# Altium PCB Mainbord___PCB.PcbDoc
Units mm, origin at the board's own origin, x right, y up, seen from the top; angles counter-clockwise.
Board outline 180 x 125 mm, 2 copper layers (Top Layer, Bottom Layer); 20 components, 15 nets, 201 pads, 0 vias.
Unrouted connection lines stored in the file: 57.
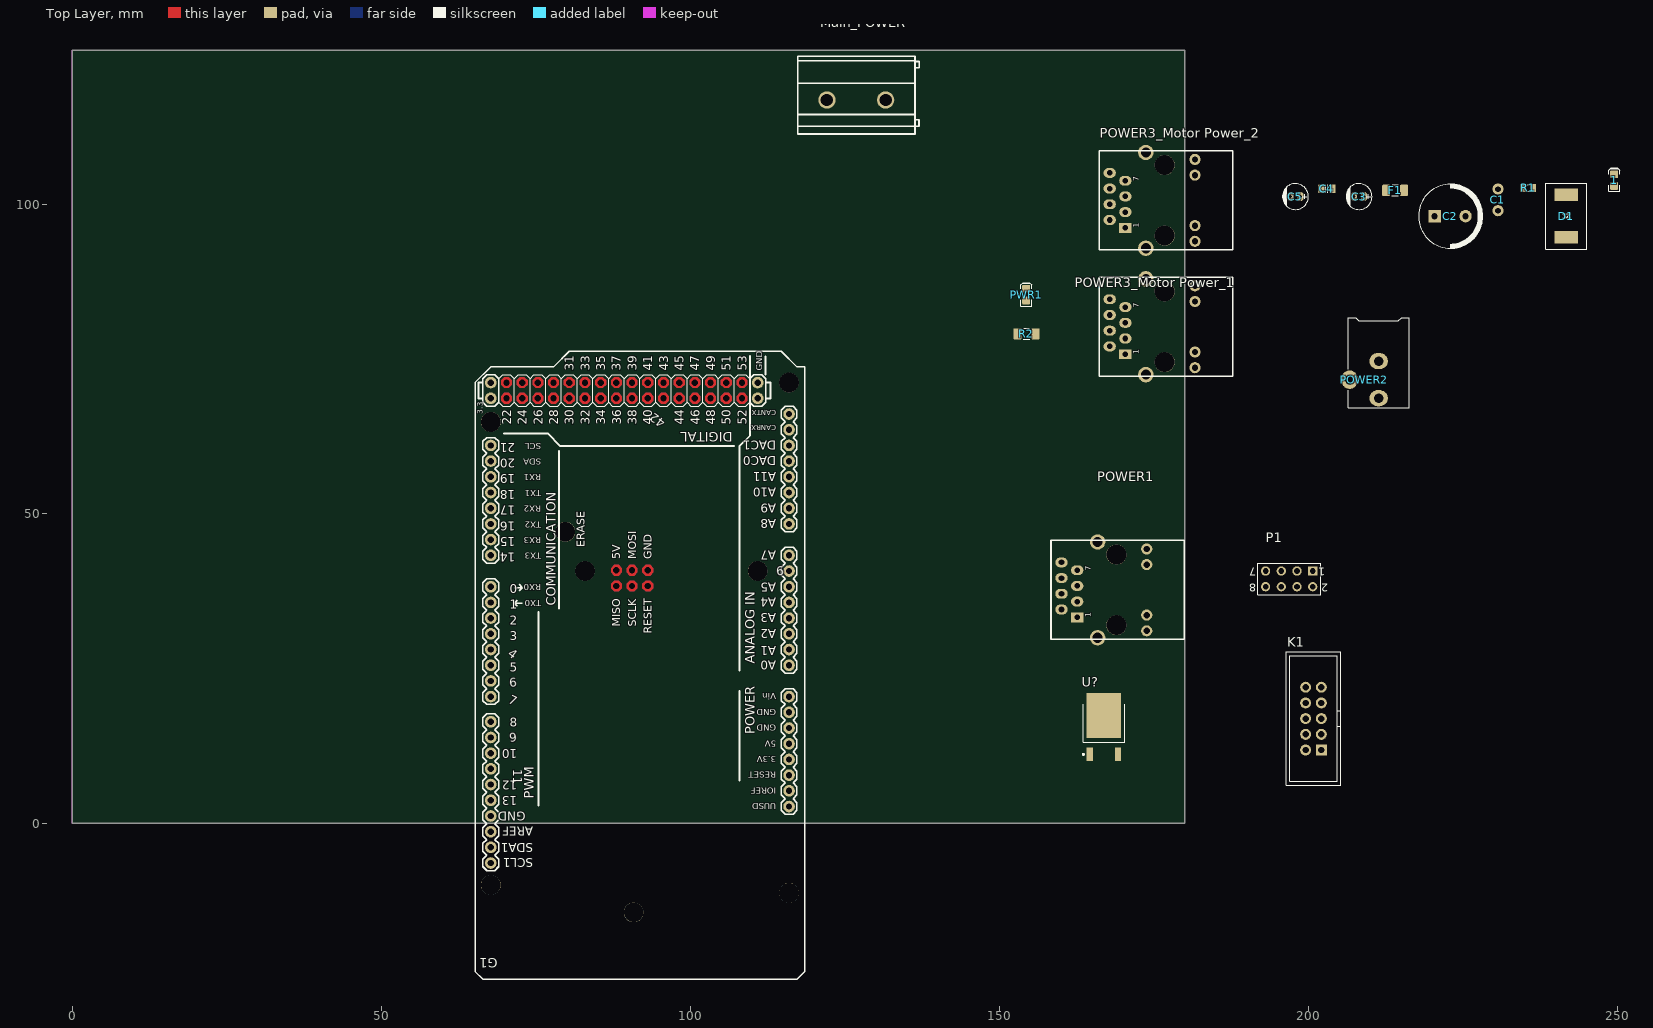
[diagram p0: Top Layer view]
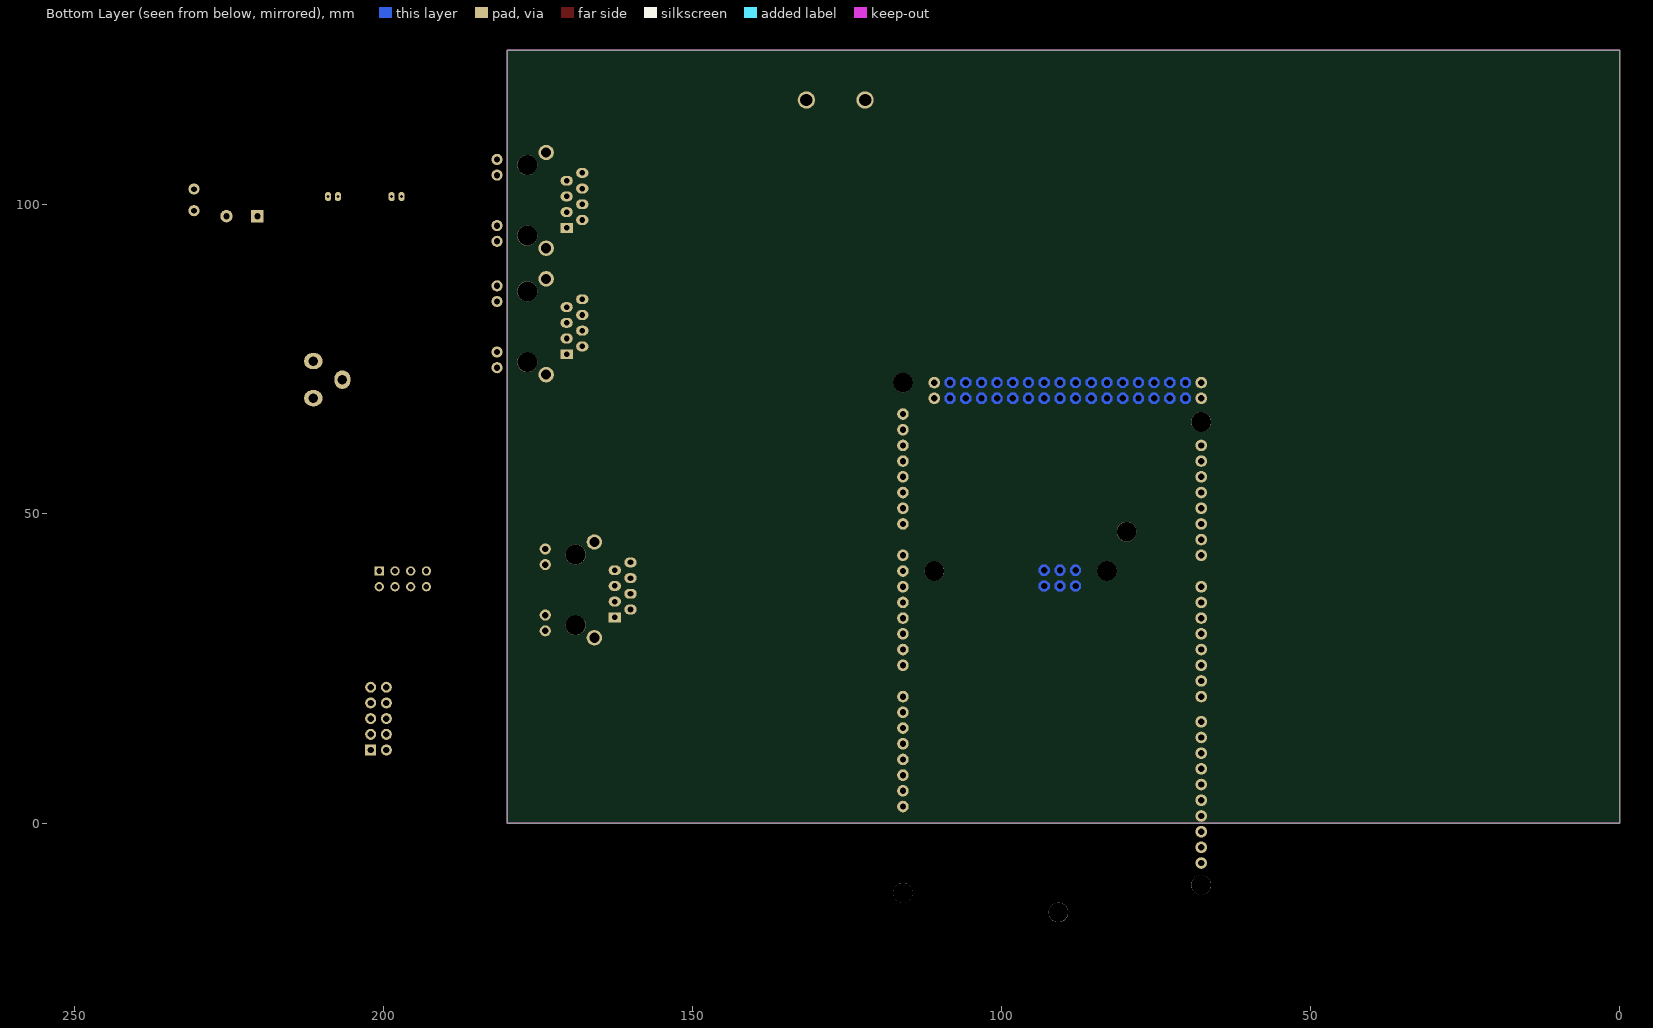
[diagram p1: Bottom Layer view, seen from below]

## Layer stack, top to bottom
Top Solder: solder mask 0.0102, Solder Resist, Dk 3.5
Top Layer: signal copper 0.0356
Dielectric 1: dielectric 0.32, FR-4, Dk 4.8
Bottom Layer: signal copper 0.0356
Bottom Solder: solder mask 0.0102, Solder Resist, Dk 3.5

## Board outline
0,0 180,0 180,125 0,125

## Design rules (kind name [scope] priority, off if disabled: settings)
Clearance [All] p1: gap=0.254 ignorepadtopadclearanceinfootprint=FALSE except(0: Arc-Hole Track-Hole SMDPad-Hole THPad-Hole Via-Hole Fill-Hole Poly-Hole Region-Hole Text-Hole)
PolygonConnect [All] p1: connectstyle=Relief reliefconductorwidth=0.254 reliefentries=4 polygonreliefangle="90 Angle" airgapwidth=0.254
RoomDefinition VL53L0x [InComponentClass('VL53L0x')] p1: confinementstyle=ConfineIn formatcopy=TRUE lockcomponents=FALSE outline 195.961,4.826 205.359,4.826 205.359,29.464 195.961,29.464
RoomDefinition "Motor Power_2" [InComponentClass('Motor Power_2')] p2: confinementstyle=ConfineIn formatcopy=TRUE lockcomponents=FALSE outline -25.4,-25.4 25.4,-25.4 25.4,0 -25.4,0
RoomDefinition "Motor Power_1" [InComponentClass('Motor Power_1')] p3: confinementstyle=ConfineIn formatcopy=TRUE lockcomponents=FALSE outline -25.4,-25.4 25.4,-25.4 25.4,0 -25.4,0
RoomDefinition Mainbord___Schematic [InComponentClass('Mainbord___Schematic')] p4: confinementstyle=ConfineIn formatcopy=TRUE lockcomponents=FALSE outline -25.4,-25.4 25.4,-25.4 25.4,0 -25.4,0
RoomDefinition SRF05_Sensor [InComponentClass('SRF05_Sensor')] p5: confinementstyle=ConfineIn formatcopy=TRUE lockcomponents=FALSE outline 189.992,42.418 189.992,36.83 205.867,36.83 205.867,42.418
RoutingVias [All] p1: holewidth=0.711 width=1.27 viastyle="Through Hole" minholewidth=0.711 minwidth=1.27 maxholewidth=0.711 maxwidth=1.27
SolderMaskExpansion [All] p1: expansion=0.102 istentingtop=FALSE
Width [All] p1: maxlimit=0.254 minlimit=0.254 preferedwidth=0.254
30 further rules are at their usual default settings.

## Classes and differential pairs
component class VL53L0x: K1
channel class Power_Block: "Motor Power_1" "Motor Power_2"
component class SRF05_Sensor: P1
component class "Motor Power_1": "POWER3_Motor Power_1"
component class "Motor Power_2": "POWER3_Motor Power_2"
component class Mainbord___Schematic: 1 C1 C2 C3 C4 C5 D1 F1 G1 Main_POWER POWER1 POWER2 PWR1 R1 R2 U?

## Components (designator, comment, footprint, x,y, rotation, side; value= is the part's Value field where it differs from the comment)
1 "Red" LED-0805-K 249.428,104.013 r90 top
C1 "330pF" "CAP Ceramic 3.5mm" 230.632,99.06 r90 top
C2 "1000u" "Cap electrolitic radial 10x16-5" 222.885,98.171 r0 top
C3 "0.1uF" "cap 00" 208.153,101.346 r0 top
C4 "approved sub OK" CAPC2012X135N 202.946,102.616 r0 top value=0.1µ
C5 "0.3uF" "cap 00" 197.866,101.346 r0 top
D1 "SMCJ120CA" DIODE-SMC 241.681,102.108 r90 top
F1 "Slow-blow" RESC3216X70N 213.995,102.362 r0 top value=2A
G1 "" Arduino_Due 67.691,71.247 r90 top
K1 "IDC10" IDC10-B 202.057,11.811 r90 top
Main_POWER "Stackable ScrewTerm" CONN-TH_P9.50_KF950-9.5-2P 127.172,117.767 r180 top value="2 position"
P1 "Header 4X2" HDR2X4 200.66,40.767 r180 top
POWER1 "215877-1 RJ45" Rj45_DS1127__HR911105A 162.56,33.274 r0 top
POWER2 "CONN_PWR_JACK_2.1x5.5mm" CONN_PWR_JACK_2.1x5.5mm 211.328,82.423 r0 top value="2.1mm ID, 5.5mm OD"
"POWER3_Motor Power_1" "215877-1 RJ45" Rj45_DS1127__HR911105A 170.36,75.84 r0 top (schematic designator POWER3)
"POWER3_Motor Power_2" "215877-1 RJ45" Rj45_DS1127__HR911105A 170.36,96.287 r0 top (schematic designator POWER3)
PWR1 "Red" LED-0805-K 154.305,85.471 r90 top
R1 "330" "RES 0805 (2012X06L)" 234.696,102.743 r0 top
R2 "Thin Film" RESC3216X70N 154.358,79.121 r0 top value=4.7K
U? "L7805" TO252-3M 166.878,15.494 r90 top

## Footprints (in the part's own frame and the unit in brackets; to place one, negate y for a bottom-side part, rotate by r counter-clockwise, add the part's x,y. Pads: shape width x height; smd on the part's side, far side on the other; paste and mask are expansions set on the pad)
Arduino_Due [mil] "Arduino_Due"
  round 74 hole 40: 0(-1300,0) 1(-1400,0) 2(-1500,0) 3(-1600,0) 3.3V(-2400,-1900) 4(-1700,0) 5(-1800,0) 5V@0(-2300,-1900) 5V@1(-100,0) 5V@2(0,0) 6(-1900,0) 7(-2000,0) 8(-2160,0) 9(-2260,0) 10(-2360,0) 11(-2460,0) 12(-2560,0) 13(-2660,0) 14(-1100,0) 15(-1000,0) 16(-900,0) 17(-800,0) 18(-700,0) 19(-600,0) 20(-500,0) 21(-400,0) A0(-1800,-1900) A1(-1700,-1900) A2(-1600,-1900) A3(-1500,-1900) A4(-1400,-1900) A5(-1300,-1900) A6(-1200,-1900) A7(-1100,-1900) A8(-900,-1900) A9(-800,-1900) A10(-700,-1900) A11(-600,-1900) AREF(-2860,0) CANRX(-300,-1900) CANTX(-200,-1900) DAC0(-500,-1900) DAC1(-400,-1900) GND@0(-2200,-1900) GND@1(-2100,-1900) GND@2(-100,-1700) GND@3(0,-1700) GND@4(-2760,0) IOREF(-2600,-1900) RESET(-2500,-1900) SCL1(-3060,0) SDA1(-2960,0) UUSD(-2700,-1900) VIN(-2000,-1900)
  round 0 hole 40: 5V@ICSP(-1195,-800) 22(-100,-100) 23(0,-100) 24(-100,-200) 25(0,-200) 26(-100,-300) 27(0,-300) 28(-100,-400) 29(0,-400) 30(-100,-500) 31(0,-500) 32(-100,-600) 33(0,-600) 34(-100,-700) 35(0,-700) 36(-100,-800) 37(0,-800) 38(-100,-900) 39(0,-900) 40(-100,-1000) 41(0,-1000) 42(-100,-1100) 43(0,-1100) 44(-100,-1200) 45(0,-1200) 46(-100,-1300) 47(0,-1300) 48(-100,-1400) 49(0,-1400) 50(-100,-1500) 51(0,-1500) 52(-100,-1600) 53(0,-1600) GND@ICSP(-1195,-1000) MISO(-1295,-800) MOSI(-1195,-900) RESET@ICSP(-1295,-1000) SCLK(-1295,-900)
  round 125.98 hole 125.98 unplated: ""(-3374,-910) ""(-3250,-1900) ""(-3200,0) ""(-1200,-1700) ""(-1200,-600) ""(-950,-475) ""(-250,0) ""(0,-1900)
  Top Layer region: -14.16,-765.82 -34.19,-785.84 -34.19,-814.16 -14.16,-834.19 14.15,-834.19 34.18,-814.16 34.18,-785.84 14.15,-765.82
  Top Layer region: -114.16,-765.82 -134.19,-785.84 -134.19,-814.16 -114.16,-834.19 -85.85,-834.19 -65.82,-814.16 -65.82,-785.84 -85.85,-765.82
  Top Layer region: -14.16,-665.82 -34.19,-685.84 -34.19,-714.16 -14.16,-734.19 14.15,-734.19 34.18,-714.16 34.18,-685.84 14.15,-665.82
  Top Layer region: -114.16,-665.82 -134.19,-685.84 -134.19,-714.16 -114.16,-734.19 -85.85,-734.19 -65.82,-714.16 -65.82,-685.84 -85.85,-665.82
  Top Layer region: -14.16,-565.82 -34.19,-585.84 -34.19,-614.16 -14.16,-634.19 14.15,-634.19 34.18,-614.16 34.18,-585.84 14.15,-565.82
  Top Layer region: -114.16,-565.82 -134.19,-585.84 -134.19,-614.16 -114.16,-634.19 -85.85,-634.19 -65.82,-614.16 -65.82,-585.84 -85.85,-565.82
  Top Layer region: -14.16,-465.82 -34.19,-485.84 -34.19,-514.16 -14.16,-534.19 14.15,-534.19 34.18,-514.16 34.18,-485.84 14.15,-465.82
  Top Layer region: -114.16,-465.82 -134.19,-485.84 -134.19,-514.16 -114.16,-534.19 -85.85,-534.19 -65.82,-514.16 -65.82,-485.84 -85.85,-465.82
  Top Layer region: -14.16,-365.82 -34.19,-385.84 -34.19,-414.16 -14.16,-434.19 14.15,-434.19 34.18,-414.16 34.18,-385.84 14.15,-365.82
  Top Layer region: -114.16,-365.82 -134.19,-385.84 -134.19,-414.16 -114.16,-434.19 -85.85,-434.19 -65.82,-414.16 -65.82,-385.84 -85.85,-365.82
  Top Layer region: -14.16,-265.82 -34.19,-285.84 -34.19,-314.16 -14.16,-334.19 14.15,-334.19 34.18,-314.16 34.18,-285.84 14.15,-265.82
  Top Layer region: -114.16,-265.82 -134.19,-285.84 -134.19,-314.16 -114.16,-334.19 -85.85,-334.19 -65.82,-314.16 -65.82,-285.84 -85.85,-265.82
  Top Layer region: -14.16,-165.82 -34.19,-185.84 -34.19,-214.16 -14.16,-234.19 14.15,-234.19 34.18,-214.16 34.18,-185.84 14.15,-165.82
  Top Layer region: -114.16,-165.82 -134.19,-185.84 -134.19,-214.16 -114.16,-234.19 -85.85,-234.19 -65.82,-214.16 -65.82,-185.84 -85.85,-165.82
  Top Layer region: -14.16,-65.82 -34.19,-85.84 -34.19,-114.16 -14.16,-134.19 14.15,-134.19 34.18,-114.16 34.18,-85.84 14.15,-65.82
  Top Layer region: -114.16,-65.82 -134.19,-85.84 -134.19,-114.16 -114.16,-134.19 -85.85,-134.19 -65.82,-114.16 -65.82,-85.84 -85.85,-65.82
  Top Layer region: -14.16,-1565.82 -34.19,-1585.84 -34.19,-1614.16 -14.16,-1634.18 14.15,-1634.18 34.18,-1614.16 34.18,-1585.84 14.15,-1565.82
  Top Layer region: -114.16,-1565.82 -134.19,-1585.84 -134.19,-1614.16 -114.16,-1634.18 -85.85,-1634.18 -65.82,-1614.16 -65.82,-1585.84 -85.85,-1565.82
  Top Layer region: -14.16,-1465.82 -34.19,-1485.84 -34.19,-1514.16 -14.16,-1534.18 14.15,-1534.18 34.18,-1514.16 34.18,-1485.84 14.15,-1465.82
  Top Layer region: -114.16,-1465.82 -134.19,-1485.84 -134.19,-1514.16 -114.16,-1534.18 -85.85,-1534.18 -65.82,-1514.16 -65.82,-1485.84 -85.85,-1465.82
  Top Layer region: -14.16,-1365.82 -34.19,-1385.84 -34.19,-1414.16 -14.16,-1434.18 14.15,-1434.18 34.18,-1414.16 34.18,-1385.84 14.15,-1365.82
  Top Layer region: -114.16,-1365.82 -134.19,-1385.84 -134.19,-1414.16 -114.16,-1434.18 -85.85,-1434.18 -65.82,-1414.16 -65.82,-1385.84 -85.85,-1365.82
  Top Layer region: -14.16,-1265.82 -34.19,-1285.84 -34.19,-1314.16 -14.16,-1334.18 14.15,-1334.18 34.18,-1314.16 34.18,-1285.84 14.15,-1265.82
  Top Layer region: -114.16,-1265.82 -134.19,-1285.84 -134.19,-1314.16 -114.16,-1334.18 -85.85,-1334.18 -65.82,-1314.16 -65.82,-1285.84 -85.85,-1265.82
  Top Layer region: -14.16,-1165.82 -34.19,-1185.84 -34.19,-1214.16 -14.16,-1234.18 14.15,-1234.18 34.18,-1214.16 34.18,-1185.84 14.15,-1165.82
  Top Layer region: -114.16,-1165.82 -134.19,-1185.84 -134.19,-1214.16 -114.16,-1234.18 -85.85,-1234.18 -65.82,-1214.16 -65.82,-1185.84 -85.85,-1165.82
  Top Layer region: -14.16,-1065.82 -34.19,-1085.84 -34.19,-1114.16 -14.16,-1134.19 14.15,-1134.19 34.18,-1114.16 34.18,-1085.84 14.15,-1065.82
  Top Layer region: -114.16,-1065.82 -134.19,-1085.84 -134.19,-1114.16 -114.16,-1134.19 -85.85,-1134.19 -65.82,-1114.16 -65.82,-1085.84 -85.85,-1065.82
  Top Layer region: -14.16,-965.82 -34.19,-985.84 -34.19,-1014.16 -14.16,-1034.19 14.15,-1034.19 34.18,-1014.16 34.18,-985.84 14.15,-965.82
  Top Layer region: -114.16,-965.82 -134.19,-985.84 -134.19,-1014.16 -114.16,-1034.19 -85.85,-1034.19 -65.82,-1014.16 -65.82,-985.84 -85.85,-965.82
  Top Layer region: -14.16,-865.82 -34.19,-885.84 -34.19,-914.16 -14.16,-934.19 14.15,-934.19 34.18,-914.16 34.18,-885.84 14.15,-865.82
  Top Layer region: -114.16,-865.82 -134.19,-885.84 -134.19,-914.16 -114.16,-934.19 -85.85,-934.19 -65.82,-914.16 -65.82,-885.84 -85.85,-865.82
  Top Layer region: -1309.16,-765.82 -1329.19,-785.84 -1329.19,-814.16 -1309.16,-834.19 -1280.84,-834.19 -1260.82,-814.16 -1260.82,-785.84 -1280.84,-765.82
  Top Layer region: -1209.16,-765.82 -1229.19,-785.84 -1229.19,-814.16 -1209.16,-834.19 -1180.84,-834.19 -1160.82,-814.16 -1160.82,-785.84 -1180.84,-765.82
  Top Layer region: -1309.16,-865.82 -1329.19,-885.84 -1329.19,-914.16 -1309.16,-934.19 -1280.84,-934.19 -1260.82,-914.16 -1260.82,-885.84 -1280.84,-865.82
  Top Layer region: -1209.16,-865.82 -1229.19,-885.84 -1229.19,-914.16 -1209.16,-934.19 -1180.84,-934.19 -1160.82,-914.16 -1160.82,-885.84 -1180.84,-865.82
  Top Layer region: -1209.16,-965.82 -1229.19,-985.84 -1229.19,-1014.16 -1209.16,-1034.19 -1180.84,-1034.19 -1160.82,-1014.16 -1160.82,-985.84 -1180.84,-965.82
  Top Layer region: -1309.16,-965.82 -1329.19,-985.84 -1329.19,-1014.16 -1309.16,-1034.19 -1280.84,-1034.19 -1260.82,-1014.16 -1260.82,-985.84 -1280.84,-965.82
  Bottom Layer region: -14.16,-765.82 -34.19,-785.84 -34.19,-814.16 -14.16,-834.19 14.15,-834.19 34.18,-814.16 34.18,-785.84 14.15,-765.82
  Bottom Layer region: -114.16,-765.82 -134.19,-785.84 -134.19,-814.16 -114.16,-834.19 -85.85,-834.19 -65.82,-814.16 -65.82,-785.84 -85.85,-765.82
  Bottom Layer region: -14.16,-665.82 -34.19,-685.84 -34.19,-714.16 -14.16,-734.19 14.15,-734.19 34.18,-714.16 34.18,-685.84 14.15,-665.82
  Bottom Layer region: -114.16,-665.82 -134.19,-685.84 -134.19,-714.16 -114.16,-734.19 -85.85,-734.19 -65.82,-714.16 -65.82,-685.84 -85.85,-665.82
  Bottom Layer region: -14.16,-565.82 -34.19,-585.84 -34.19,-614.16 -14.16,-634.19 14.15,-634.19 34.18,-614.16 34.18,-585.84 14.15,-565.82
  Bottom Layer region: -114.16,-565.82 -134.19,-585.84 -134.19,-614.16 -114.16,-634.19 -85.85,-634.19 -65.82,-614.16 -65.82,-585.84 -85.85,-565.82
  Bottom Layer region: -14.16,-465.82 -34.19,-485.84 -34.19,-514.16 -14.16,-534.19 14.15,-534.19 34.18,-514.16 34.18,-485.84 14.15,-465.82
  Bottom Layer region: -114.16,-465.82 -134.19,-485.84 -134.19,-514.16 -114.16,-534.19 -85.85,-534.19 -65.82,-514.16 -65.82,-485.84 -85.85,-465.82
  Bottom Layer region: -14.16,-365.82 -34.19,-385.84 -34.19,-414.16 -14.16,-434.19 14.15,-434.19 34.18,-414.16 34.18,-385.84 14.15,-365.82
  Bottom Layer region: -114.16,-365.82 -134.19,-385.84 -134.19,-414.16 -114.16,-434.19 -85.85,-434.19 -65.82,-414.16 -65.82,-385.84 -85.85,-365.82
  Bottom Layer region: -14.16,-265.82 -34.19,-285.84 -34.19,-314.16 -14.16,-334.19 14.15,-334.19 34.18,-314.16 34.18,-285.84 14.15,-265.82
  Bottom Layer region: -114.16,-265.82 -134.19,-285.84 -134.19,-314.16 -114.16,-334.19 -85.85,-334.19 -65.82,-314.16 -65.82,-285.84 -85.85,-265.82
  Bottom Layer region: -14.16,-165.82 -34.19,-185.84 -34.19,-214.16 -14.16,-234.19 14.15,-234.19 34.18,-214.16 34.18,-185.84 14.15,-165.82
  Bottom Layer region: -114.16,-165.82 -134.19,-185.84 -134.19,-214.16 -114.16,-234.19 -85.85,-234.19 -65.82,-214.16 -65.82,-185.84 -85.85,-165.82
  Bottom Layer region: -14.16,-65.82 -34.19,-85.84 -34.19,-114.16 -14.16,-134.19 14.15,-134.19 34.18,-114.16 34.18,-85.84 14.15,-65.82
  Bottom Layer region: -114.16,-65.82 -134.19,-85.84 -134.19,-114.16 -114.16,-134.19 -85.85,-134.19 -65.82,-114.16 -65.82,-85.84 -85.85,-65.82
  Bottom Layer region: -14.16,-1565.82 -34.19,-1585.84 -34.19,-1614.16 -14.16,-1634.18 14.15,-1634.18 34.18,-1614.16 34.18,-1585.84 14.15,-1565.82
  Bottom Layer region: -114.16,-1565.82 -134.19,-1585.84 -134.19,-1614.16 -114.16,-1634.18 -85.85,-1634.18 -65.82,-1614.16 -65.82,-1585.84 -85.85,-1565.82
  Bottom Layer region: -14.16,-1465.82 -34.19,-1485.84 -34.19,-1514.16 -14.16,-1534.18 14.15,-1534.18 34.18,-1514.16 34.18,-1485.84 14.15,-1465.82
  Bottom Layer region: -114.16,-1465.82 -134.19,-1485.84 -134.19,-1514.16 -114.16,-1534.18 -85.85,-1534.18 -65.82,-1514.16 -65.82,-1485.84 -85.85,-1465.82
  Bottom Layer region: -14.16,-1365.82 -34.19,-1385.84 -34.19,-1414.16 -14.16,-1434.18 14.15,-1434.18 34.18,-1414.16 34.18,-1385.84 14.15,-1365.82
  Bottom Layer region: -114.16,-1365.82 -134.19,-1385.84 -134.19,-1414.16 -114.16,-1434.18 -85.85,-1434.18 -65.82,-1414.16 -65.82,-1385.84 -85.85,-1365.82
  Bottom Layer region: -14.16,-1265.82 -34.19,-1285.84 -34.19,-1314.16 -14.16,-1334.18 14.15,-1334.18 34.18,-1314.16 34.18,-1285.84 14.15,-1265.82
  Bottom Layer region: -114.16,-1265.82 -134.19,-1285.84 -134.19,-1314.16 -114.16,-1334.18 -85.85,-1334.18 -65.82,-1314.16 -65.82,-1285.84 -85.85,-1265.82
  Bottom Layer region: -14.16,-1165.82 -34.19,-1185.84 -34.19,-1214.16 -14.16,-1234.18 14.15,-1234.18 34.18,-1214.16 34.18,-1185.84 14.15,-1165.82
  Bottom Layer region: -114.16,-1165.82 -134.19,-1185.84 -134.19,-1214.16 -114.16,-1234.18 -85.85,-1234.18 -65.82,-1214.16 -65.82,-1185.84 -85.85,-1165.82
  Bottom Layer region: -14.16,-1065.82 -34.19,-1085.84 -34.19,-1114.16 -14.16,-1134.19 14.15,-1134.19 34.18,-1114.16 34.18,-1085.84 14.15,-1065.82
  Bottom Layer region: -114.16,-1065.82 -134.19,-1085.84 -134.19,-1114.16 -114.16,-1134.19 -85.85,-1134.19 -65.82,-1114.16 -65.82,-1085.84 -85.85,-1065.82
  Bottom Layer region: -14.16,-965.82 -34.19,-985.84 -34.19,-1014.16 -14.16,-1034.19 14.15,-1034.19 34.18,-1014.16 34.18,-985.84 14.15,-965.82
  Bottom Layer region: -114.16,-965.82 -134.19,-985.84 -134.19,-1014.16 -114.16,-1034.19 -85.85,-1034.19 -65.82,-1014.16 -65.82,-985.84 -85.85,-965.82
  Bottom Layer region: -14.16,-865.82 -34.19,-885.84 -34.19,-914.16 -14.16,-934.19 14.15,-934.19 34.18,-914.16 34.18,-885.84 14.15,-865.82
  Bottom Layer region: -114.16,-865.82 -134.19,-885.84 -134.19,-914.16 -114.16,-934.19 -85.85,-934.19 -65.82,-914.16 -65.82,-885.84 -85.85,-865.82
  Bottom Layer region: -1309.16,-765.82 -1329.19,-785.84 -1329.19,-814.16 -1309.16,-834.19 -1280.84,-834.19 -1260.82,-814.16 -1260.82,-785.84 -1280.84,-765.82
  Bottom Layer region: -1209.16,-765.82 -1229.19,-785.84 -1229.19,-814.16 -1209.16,-834.19 -1180.84,-834.19 -1160.82,-814.16 -1160.82,-785.84 -1180.84,-765.82
  Bottom Layer region: -1309.16,-865.82 -1329.19,-885.84 -1329.19,-914.16 -1309.16,-934.19 -1280.84,-934.19 -1260.82,-914.16 -1260.82,-885.84 -1280.84,-865.82
  Bottom Layer region: -1209.16,-865.82 -1229.19,-885.84 -1229.19,-914.16 -1209.16,-934.19 -1180.84,-934.19 -1160.82,-914.16 -1160.82,-885.84 -1180.84,-865.82
  Bottom Layer region: -1209.16,-965.82 -1229.19,-985.84 -1229.19,-1014.16 -1209.16,-1034.19 -1180.84,-1034.19 -1160.82,-1014.16 -1160.82,-985.84 -1180.84,-965.82
  Bottom Layer region: -1309.16,-965.82 -1329.19,-985.84 -1329.19,-1014.16 -1309.16,-1034.19 -1280.84,-1034.19 -1260.82,-1014.16 -1260.82,-985.84 -1280.84,-965.82
  silkscreen extent -3800,-2000 200,100
"cap 00" [mm]
  oval 1x1.5 hole 0.5: 1(0.8,0) 2(-0.8,0)
  silkscreen extent -2.1,-2.1 2.1,2.1
"CAP Ceramic 3.5mm" [mm] "Bipolar Capacitor-Design:Ali Hafizi"
  round 1.8 hole 0.9: 1(0,0) 2(3.5,0)
"Cap electrolitic radial 10x16-5" [mm] "Cap electrolitic radial 10x16-5-Design:Abbas Basereh"
  rect 2x2 hole 1: 1(-2.5,0)
  round 2 hole 1: 2(2.5,0)
  silkscreen extent -5.1,-5.2 5.3,5.2, body extent -5,-5 5,5, height 16
CAPC2012X135N [mm] "Chip Capacitor, Body 2.0x1.2mm, EIA 0805, IPC Medium Density"
  round 0.254 on Mech15: 0(0,0)
  rrect25% 1x1.4 smd: 1(-0.9,0) 2(0.9,0)
  Top Layer pour cut-out: -0.675,0.7 -0.475,0.9 0.475,0.9 0.675,0.7 0.675,-0.7 0.475,-0.9 -0.475,-0.9 -0.675,-0.7
  silkscreen extent -0.15,-0.65 0.15,0.65, body extent -1.1,-0.72 1.1,0.73, height 1.34
CONN-TH_P9.50_KF950-9.5-2P [mm]
  round 2.8 hole 2: 1(-4.4,0.8) 2(5.1,0.8)
  silkscreen extent -9.85,-6.3 9.85,6.3, body extent -9.75,-6.62 9.85,5.88, height 21.51
CONN_PWR_JACK_2.1x5.5mm [mm] "Power Connector, 2.1mm ID, 5.5mm OD"
  oval 3x2.6 hole 1.511: 1(0,-13.7) 2(0,-7.7)
  oval 2.6x3 hole 1.511: 3(-4.7,-10.7)
  silkscreen extent -4.9,-15.22 4.92,-0.7, body extent -4.9,-14.1 4.5,0, height 11
DIODE-SMC [mil]
  rect 80x150 smd: A(-19.69,0) K(-288.74,0)
  silkscreen extent -365,-130 55,130, body extent -309,-118 2,118, height 84
HDR2X4 [mm] "Connector; Header; 4x2 Position"
  rect 1.5x1.5 hole 0.9: 1(0,0)
  round 1.5 hole 0.9: 2(0,2.54) 3(2.54,0) 4(2.54,2.54) 5(5.08,0) 6(5.08,2.54) 7(7.62,0) 8(7.62,2.54)
  silkscreen extent -1.27,-1.27 8.89,3.81
IDC10-B [mil]
  rect 70x70 hole 40: 1(0,0)
  round 70 hole 40: 2(0,100) 3(100,0) 4(100,100) 5(200,0) 6(200,100) 7(300,0) 8(300,100) 9(400,0) 10(400,100)
  silkscreen extent -225,-125 625,225, body extent -225,-125 625,225, height 358
LED-0805-K [mil]
  round 20 on Mech15: 0(0,0)
  rrect25% 50x50 smd: A(-37.5,0) K(37.5,0)
  Top Layer pour cut-out: -15,30 15,30 15,-30 -15,-30
  silkscreen extent -72,-35 77,35, body extent -39,-25 39,25, height 31
"RES 0805 (2012X06L)" [mm] "Chip Resistor, 2-Leads, Body 2.0x1.3mm, IPC High Density _ (0.100 W)"
  rect 0.95x1.3 smd: 1(0,0) 2(1.65,0)
  silkscreen extent 0.67,-0.55 0.97,0.55, body extent -0.19,-0.63 1.84,0.64, height 0.6
RESC3216X70N [mm] "Chip Resistor, Body 3.2x1.6mm, EIA 1206, IPC Medium Density"
  round 0.508 on Mech15: 0(0,0)
  rrect25% 1.3x1.8 smd: 1(-1.45,0) 2(1.45,0)
  silkscreen extent -0.51,-0.89 0.51,0.89, body extent -1.62,-0.82 1.63,0.83, height 0.69
Rj45_DS1127__HR911105A [mm] "HR911105A"
  rect 2x1.6 hole 0.9: 1(0,0)
  oval 2x1.6 hole 0.9: 2(-2.54,1.27) 3(0,2.54) 4(-2.54,3.81) 5(0,5.08) 6(-2.54,6.35) 7(0,7.62) 8(-2.54,8.89)
  round 1.8 hole 1.02: 9(11.25,-2.18) 10(11.25,0.36) 11(11.25,8.53) 12(11.25,11.07)
  round 2.5 hole 1.63: 13(3.3,12.19) 14(3.3,-3.3)
  round 3.25 hole 3.25 unplated: C(6.35,10.16) D(6.35,-1.27)
  silkscreen extent -4.23,-3.55 17.35,12.45, body extent -4.19,-3.49 17.21,12.39, height 13.5
TO252-3M [mm] "D-PAK, 3-Pads, Body 6.2x6.7mm (max), IPC Low Density"
  rect 2.2x1 smd: 1(-4.4,2.28) 3(-4.4,-2.28)
  rect 7.2x5.6 smd: 4(1.9,0)
  silkscreen extent -4.52,-3.35 3.7,3.45, body extent -5.06,-3.27 4.88,3.27, height 2.39

## Part data
1 PWR1: library part LED_SMD_Red_0805_6mcd, "LED 0805 SMD Red 6mcd 621nm", Manufacturer 1="Lite-On Inc", Manufacturer Part Number 1=LTST-C171EKT, Package / Case=0805, Ratings="6 mcd; 621 nm", Supplier Part Number 1=160-1422-1-ND, Color=Red, Material="GaAsP on GaP", SCDType=source, Supplier 1=Digi-Key
C1: library part "CAP CERAMIC TOTAL SIZE", "CAP Ceramic Total", Designer="Ali Hafizi"
C2: library part "CAP POL 1000uF TH", "NICHICON   UVR1E102MPD1TD   ALUMINUM ELECTROLYTIC CAPACITOR, 1000UF, 25V, 20%, RADIAL, FULL REEL", Capacitance=1mF, Case/Package=Radial, Dielectric Material=Aluminium, Leakage Current=750uA, Manufacturer=Nichicon, Manufacturer Part Number=UVR1E102MPD1TD, Max Operating Temperature=85°C, Min Operating Temperature=-40°C, Package Quantity=500, Ripple Current=960mA, Supplier Part Number 1=493-5913-1-ND, Tolerance=20%, Voltage=25V, Category="Aluminum Electrolytic Capacitors", ComponentLink1Description=https://datasheet.ciiva.com/7851/e-vr-7851718.pdf?src-supplier=Element14, ComponentLink1URL=https://datasheet.ciiva.com/7851/e-vr-7851718.pdf?src-supplier=Element14, ComponentLink2Description=https://datasheet.ciiva.com/6300/e-vr-6300009.pdf?src-supplier=Digi-Key, ComponentLink2URL=https://datasheet.ciiva.com/6300/e-vr-6300009.pdf?src-supplier=Digi-Key, ComponentLink3Description=https://datasheet.ciiva.com/6300/e-vr-6300010.pdf?src-supplier=Digi-Key, ComponentLink3URL=https://datasheet.ciiva.com/6300/e-vr-6300010.pdf?src-supplier=Digi-Key, ComponentLink4Description=https://datasheet.ciiva.com/11684/e-vr-11684106.pdf?src-supplier=Avnet, ComponentLink4URL=https://datasheet.ciiva.com/11684/e-vr-11684106.pdf?src-supplier=Avnet, ComponentLink5Description=https://datasheet.ciiva.com/16502/e-vr-16502813.pdf?src-supplier=Future+Electronics, ComponentLink5URL=https://datasheet.ciiva.com/16502/e-vr-16502813.pdf?src-supplier=Future+Electronics, ComponentLink6Description=https://datasheet.ciiva.com/46381/1909356-46381757.pdf?src-supplier=Element14, ComponentLink6URL=https://datasheet.ciiva.com/46381/1909356-46381757.pdf?src-supplier=Element14, Diameter=10mm, Dissipation Factor=0.16%, Height=20mm, Height - Seated (Max)=0.866inch, Lead Diameter=0.6mm, Lead Free="Lead Free", Lead Pitch=5mm, Length=20mm, Life (Hours)=2000Hour, Mount="Through Hole,PCB", Number of Pins=2, Packaging="Tape and Reel", Pricing 1="1=0.58000, 10=0.40800, 100=0.26890 (USD)", Radiation Hardening=No, REACH SVHC="No SVHC", RoHS=Yes, Stock 1=43448, Supplier 1=Digi-Key, Termination=Radial, Voltage Rating=25V, Voltage Rating (DC)=25V
C3 C5: library part Cap-Polar, "Polar Capacitor", Voltage=35V, Adding Date=1387/12/20, Designer="Saeid Jorablo", Organazation=ControTec
C4: library part CAPC_1u_0805_X7R_16V_10%, "Capacitor SMD Cer 1uF 10% 16V X7R 0805", Manufacturer 1=Yageo, Manufacturer 2=Kemet, Manufacturer 3="Samsung Electro-Mechanics America, Inc", Manufacturer 4="TDK Corporation", Manufacturer Part Number 1=CC0805KKX7R7BB105, Manufacturer Part Number 2=C0805C105K4RACTU, Manufacturer Part Number 3=CL21B105KOFNNNE, Manufacturer Part Number 4=C2012X7R1C105K125AA, Package / Case="0805 (2012 metric)", Ratings="16V; X7R", Supplier Part Number 1=311-1365-6-ND, Temperature Coefficient=X7R, Tolerance=±10%, ComponentLink1Description=http://www.yageo.com/documents/recent/UPY-GPHC_X7R_6.3V-to-50V_8.pdf, ComponentLink1URL=http://www.yageo.com/documents/recent/UPY-GPHC_X7R_6.3V-to-50V_8.pdf, ComponentLink2Description=http://www.kemet.com/datasheets&C0805C105K4RACTU, ComponentLink2URL=http://www.kemet.com/datasheets&C0805C105K4RACTU, ComponentLink3Description=http://www.samsungsem.com/servlet/FileDownload?type=spec&file=CL21B105KOFNNNE.pdf, ComponentLink3URL=http://www.samsungsem.com/servlet/FileDownload?type=spec&file=CL21B105KOFNNNE.pdf, ComponentLink4Description=http://product.tdk.com/capacitor/mlcc/en/documents/mlcc_commercial_general_en.pdf, ComponentLink4URL=http://product.tdk.com/capacitor/mlcc/en/documents/mlcc_commercial_general_en.pdf, Material=ceramic, RoHS 1="RoHS Compliant", RoHS 2="RoHS Compliant", RoHS 3="RoHS Compliant", RoHS 4="RoHS Compliant", SCDType=spec, Supplier 1=Digi-Key, Supplier 2=Digi-Key, Supplier 3=Digi-Key, Supplier 4=Digi-Key, Supplier Part Number 2=399-1284-6-ND, Supplier Part Number 3=1276-1026-6-ND, Supplier Part Number 4=445-1358-6-ND
D1: "Transient Surpression Diode TVS", Supplier Part Number 1=SMCJ120CABTR-ND, Supplier 1=Digi-Key
F1: library part FUSE_160mA_1206, "Fuse 160mA 63VDC 1206 SMD", Manufacturer 1="Holly Fuse", Manufacturer Part Number 1=12T-0160L, Package / Case="1206 (3216 metric)", Ratings="160mA; 63VDC; slow-blow", SCDType=spec
G1: library part "ARDUINO DUE V2"
K1: "BOXHEADER 10 PIN", Color=Gray, Manufacturer="Assmann Electronics Inc", Manufacturer Part Number=AWHW10G-0202-T-R, Supplier Part Number=HRP10H-ND, Category="Connectors, Interconnects", Connector Type="Header, Shrouded", Contact Finish=Gold, Contact Finish Thickness=Flash, Contact Mating Length=-, Contact Type="Male Pin", Fastening Type=-, Features=-, Mounting Type="Through Hole", Number of Positions=10, Number of Positions Loaded=All, Number of Rows=2, Packaging=Tray, Pitch="0.100\" (2.54mm)", RoHS="RoHS Compliant", Row Spacing="0.100\" (2.54mm)", Supplier=Digi-Key, Supplier 1=Digi-Key, Supplier Part Number 1=HRP10H-ND, Termination=Solder
Main_POWER: library part 2P_ScrewTerm_90S_3.81MM, "Terminal Block Screw Type THT 2-Position 3.81mm pitch", Color=Black, Manufacturer 1="Tyco Electronics", Manufacturer Part Number 1=1776113-2, Package / Case="Side Entry; 3.81mm pitch", Supplier Part Number 1=Fk950, Category="Connectors Interconnects", Pitch="0.150\" (3.81mm)", Positions Per Level=2, SCDType=undef, Supplier 1=Digi-Key
P1: "Header, 4-Pin, Dual row", LatestRevisionDate=17-Jul-2002, LatestRevisionNote="Re-released for DXP Platform.", Publisher="Altium Limited"
POWER1 "POWER3_Motor Power_1" "POWER3_Motor Power_2": "Female Header, Pitch 2.54 mm, 2 x 4 Position, Height 11.5 mm, Tail Length 3 mm, -40 to 105 degC, RoHS, Tape and Reel", LED Color="Does Not Contain LED", Ratings=Cat3, Standard Package=1, Supplier Part Number 1=A105009TR-ND, 3D Model=215877-1.pdf, Category="Connectors, Interconnects", ComponentLink1Description="Manufacturer URL", ComponentLink1URL=http://www.te.com, ComponentLink2Description=Datasheet, ComponentLink2URL=https://datasheet.ciiva.com/16310/215877-1-16310656.pdf, Connector Type=Jack, Contact Finish=Gold, Contact Material="Phosphor Bronze", DatasheetVersion="Rev. AE", Dynamic Catalog="Modular Jacks", Family="Modular Connectors - Jacks", Features="Board Lock", Housing Material="Polybutylene Terephthalate (PBT)", Mounting Type="Through Hole", Number of Ports=1, Number of Positions/Contacts="8p8c (RJ45, Ethernet)", Number of Rows=1, Orientation="90° Angle (Right)", Other Names=A105009CT, PackageReference=THD, Packaging="Cut Tape (CT)", RoHS Information="215877-1 Statement of Compliance", Shielding=Unshielded, Supplier 1=Digi-Key, Supplier 2=Digi-Key, Supplier Part Number 2=A105009CT-ND, Tab Direction=Down, Termination=Solder
POWER2: "Power Connector, THT, 2.1mm ID, 5.5mm OD", Manufacturer 1="CUI Inc", Manufacturer Part Number 1=PJ-102AH, Package / Case="PCB mount", Supplier Part Number 1=CP-102AH-ND, Category=Connectors, Mounting Type="Through Hole", SCDType=undef, Supplier 1=Digi-Key
R1: library part Resistor, "Resistor", Power="1/8 W", Tolerance=5%
R2: library part RES_91R_1206_5%, "Resistor SMD chip 91 Ohm 0.25W 5% 1206", Manufacturer 1=Yageo, Manufacturer Part Number 1=RC1206JR-0791RL, Package / Case="1206 (3216 Metric)", Ratings="1/4 W", Supplier Part Number 1=311-91ERCT-ND, Tolerance=±5%, ComponentLink1Description=http://www.yageo.com/documents/recent/PYu-RC1206_51_RoHS_L_4.pdf, ComponentLink1URL=http://www.yageo.com/documents/recent/PYu-RC1206_51_RoHS_L_4.pdf, Material="Thin Film", SCDType=spec, Supplier 1=Digi-Key
U?: library part L7805-D2PAK, "LINEAR REGULATOR 5.0V", Supplier Part Number 1=497-1170-6-ND, Supplier 1=Digi-Key

## Nets (pads, with @x,y where several pads share a name; then routed paths per layer and width w, separated by ;. In a path a pad name is that pad's centre, name@x,y a point inside that pad or via, vN(x,y) a via of type N, cw(c..) or ccw(c..) an arc to the next point about the centre after c; other vN are vias at no path point)
ECHO: P1.5 P1.6
G: "POWER3_Motor Power_1.1" "POWER3_Motor Power_1.2" "POWER3_Motor Power_1.3" "POWER3_Motor Power_1.4" "POWER3_Motor Power_2.1" "POWER3_Motor Power_2.2" "POWER3_Motor Power_2.3" "POWER3_Motor Power_2.4" C1.1 C2.2 C3.2 C4.2 C5.2 D1.A K1.9 K1.10 Main_POWER.2 R1.1 R2.2 U?.4
G: P1.7 P1.8
Net1_K: 1.K R1.2
NetC4_1: C4.1 C5.1 F1.1 U?.3
NetD1_K: D1.K POWER1.1 POWER1.2 POWER1.3 POWER1.4 POWER2.2 POWER2.3
NetPWR1_K: PWR1.K R2.1
SCL: K1.3 K1.4
SDA: K1.5 K1.6
TRIG: P1.3 P1.4
V5: 1.A F1.2
Vcc: K1.1 K1.2
VCC: P1.1 P1.2
Vm: "POWER3_Motor Power_1.5" "POWER3_Motor Power_1.6" "POWER3_Motor Power_1.7" "POWER3_Motor Power_1.8" "POWER3_Motor Power_2.5" "POWER3_Motor Power_2.6" "POWER3_Motor Power_2.7" "POWER3_Motor Power_2.8" C1.2 C2.1 C3.1 Main_POWER.1 POWER1.5 POWER1.6 POWER1.7 POWER1.8 POWER2.1 PWR1.A U?.1
Xshut: K1.7 K1.8
pads on no net: 1.0 "POWER3_Motor Power_1.9" "POWER3_Motor Power_1.10" "POWER3_Motor Power_1.11" "POWER3_Motor Power_1.12" "POWER3_Motor Power_1.13" "POWER3_Motor Power_1.14" "POWER3_Motor Power_1.C" "POWER3_Motor Power_1.D" "POWER3_Motor Power_2.9" "POWER3_Motor Power_2.10" "POWER3_Motor Power_2.11" "POWER3_Motor Power_2.12" "POWER3_Motor Power_2.13" "POWER3_Motor Power_2.14" "POWER3_Motor Power_2.C" "POWER3_Motor Power_2.D" C4.0 F1.0 G1. G1.0 G1.1 G1.2 G1.3 G1.3.3V G1.4 G1.5 G1.5V@0 G1.5V@1 G1.5V@2 G1.5V@ICSP G1.6 G1.7 G1.8 G1.9 G1.10 G1.11 G1.12 G1.13 G1.14 G1.15 G1.16 G1.17 G1.18 G1.19 G1.20 G1.21 G1.22 G1.23 G1.24 G1.25 G1.26 G1.27 G1.28 G1.29 G1.30 G1.31 G1.32 G1.33 G1.34 G1.35 G1.36 G1.37 G1.38 G1.39 G1.40 G1.41 G1.42 G1.43 G1.44 G1.45 G1.46 G1.47 G1.48 G1.49 G1.50 G1.51 G1.52 G1.53 G1.A0 G1.A1 G1.A2 G1.A3 G1.A4 G1.A5 G1.A6 G1.A7 G1.A8 G1.A9 G1.A10 G1.A11 G1.AREF G1.CANRX G1.CANTX G1.DAC0 G1.DAC1 G1.GND@0 G1.GND@1 G1.GND@2 G1.GND@3 G1.GND@4 G1.GND@ICSP G1.IOREF G1.MISO G1.MOSI G1.RESET G1.RESET@ICSP G1.SCL1 G1.SCLK G1.SDA1 G1.UUSD G1.VIN POWER1.9 POWER1.10 POWER1.11 POWER1.12 POWER1.13 POWER1.14 POWER1.C POWER1.D PWR1.0 R2.0

## Keep-outs
Keep-Out Layer:
  the board outline again, w0.2

## Text inside footprints (layer, text, board x,y; h text height)
G1: Top Overlay "0" at 70.739,37.186 h1.42; Top Overlay "1" at 70.739,34.646 h1.42; Top Overlay "2" at 70.739,32.106 h1.42; Top Overlay "3" at 70.739,29.566 h1.42; Top Overlay "4" at 70.321,27.161 h1.42 r324; Top Overlay "5" at 70.739,24.486 h1.42; Top Overlay "6" at 70.801,21.948 h1.42 r5; Top Overlay "7" at 70.438,19.472 h1.42 r335; Top Overlay "8" at 70.739,15.596 h1.42; Top Overlay "9" at 70.801,13.058 h1.42 r5; Top Overlay "10" at 72.009,11.938 h1.42 r180; Top Overlay "11" at 71.298,8.687 h1.42 r270; Top Overlay "12" at 72.009,6.858 h1.42 r180; Top Overlay "13" at 72.009,4.318 h1.42 r180; Top Overlay "14" at 71.628,43.688 h1.42 r180; Top Overlay "15" at 71.628,46.228 h1.42 r180; Top Overlay "16" at 71.628,48.768 h1.42 r180; Top Overlay "17" at 71.628,51.308 h1.42 r180; Top Overlay "18" at 71.628,53.848 h1.42 r180; Top Overlay "19" at 71.628,56.388 h1.42 r180; Top Overlay "20" at 71.628,58.928 h1.42 r180; Top Overlay "21" at 71.628,61.468 h1.42 r180; Top Overlay "22" at 70.993,64.414 h1.42 r90; Top Overlay "24" at 73.533,64.414 h1.42 r90; Top Overlay "26" at 76.073,64.414 h1.42 r90; Top Overlay "28" at 78.613,64.414 h1.42 r90; Top Overlay "30" at 81.153,64.414 h1.42 r90; Top Overlay "32" at 83.693,64.414 h1.42 r90; Top Overlay "34" at 86.233,64.414 h1.42 r90; Top Overlay "36" at 88.773,64.414 h1.42 r90; Top Overlay "38" at 91.313,64.414 h1.42 r90; Top Overlay "40" at 93.853,64.414 h1.42 r90; Top Overlay "42" at 96.1,64.99 h1.42 r144; Top Overlay "44" at 98.933,64.414 h1.42 r90; Top Overlay "46" at 101.473,64.414 h1.42 r90; Top Overlay "50" at 106.553,64.414 h1.42 r90; Top Overlay "48" at 104.013,64.414 h1.42 r90; Top Overlay "52" at 109.093,64.414 h1.42 r90; Top Overlay "31" at 81.128,73.152 h1.42 r90; Top Overlay "33" at 83.668,73.152 h1.42 r90; Top Overlay "35" at 86.208,73.152 h1.42 r90; Top Overlay "37" at 88.748,73.152 h1.42 r90; Top Overlay "39" at 91.288,73.152 h1.42 r90; Top Overlay "41" at 93.828,73.152 h1.42 r90; Top Overlay "43" at 96.368,73.152 h1.42 r90; Top Overlay "45" at 98.908,73.152 h1.42 r90; Top Overlay "47" at 101.448,73.152 h1.42 r90; Top Overlay "49" at 103.988,73.152 h1.42 r90; Top Overlay "51" at 106.528,73.152 h1.42 r90; Top Overlay "53" at 109.068,73.152 h1.42 r90; Top Overlay "A0" at 113.894,26.289 h1.42 r180; Top Overlay "A1" at 113.894,28.575 h1.42 r180; Top Overlay "A2" at 113.894,31.369 h1.42 r180; Top Overlay "A3" at 113.894,33.909 h1.42 r180; Top Overlay "A4" at 113.894,36.449 h1.42 r180; Top Overlay "A5" at 113.894,38.862 h1.42 r180; Top Overlay "6" at 113.956,39.982 h1.42 r5; Top Overlay "A7" at 113.894,44.069 h1.42 r180; Top Overlay "A8" at 113.894,49.149 h1.42 r180; Top Overlay "A9" at 113.894,51.689 h1.42 r180; Top Overlay "A10" at 113.894,54.229 h1.42 r180; Top Overlay "A11" at 113.894,56.769 h1.42 r180; Top Overlay "DAC0" at 113.894,59.309 h1.42 r180; Top Overlay "DAC1" at 113.894,61.849 h1.42 r180; Top Overlay "CANRX" at 113.894,64.389 h0.81 r180; Top Overlay "CANTX" at 113.894,66.802 h0.81 r180; Top Overlay "ANALOG IN" at 110.363,25.781 h1.52 r90; Top Overlay "COMMUNICATION" at 78.232,35.179 h1.52 r90; Top Overlay "DIGITAL" at 106.807,63.246 h1.52 r180; Top Overlay "GND" at 111.608,73.152 h1.02 r90; Top Overlay "TX0" at 75.819,36.068 h1.02 r180; Top Overlay "RX0" at 75.819,38.608 h1.02 r180; Top Overlay "PWM" at 74.676,3.937 h1.52 r90; Top Overlay "TX3" at 75.819,43.688 h1.02 r180; Top Overlay "RX3" at 75.819,46.228 h1.02 r180; Top Overlay "TX2" at 75.819,48.768 h1.02 r180; Top Overlay "RX2" at 75.819,51.308 h1.02 r180; Top Overlay "TX1" at 75.819,53.848 h1.02 r180; Top Overlay "RX1" at 75.819,56.388 h1.02 r180; Top Overlay "SDA" at 75.819,58.928 h1.02 r180; Top Overlay "SCL" at 75.819,61.468 h1.02 r180; Top Overlay "POWER" at 110.363,14.351 h1.52 r90; Top Overlay "RESET" at 113.894,8.255 h1.02 r180; Top Overlay "3.3V" at 113.894,10.795 h1.02 r180; Top Overlay "5V" at 113.894,13.335 h1.02 r180; Top Overlay "GND" at 113.894,15.875 h1.02 r180; Top Overlay "GND" at 113.894,18.415 h1.02 r180; Top Overlay "Vin" at 113.894,20.955 h1.02 r180; Top Overlay "GND" at 73.309,1.803 h1.42 r180; Top Overlay "AREF" at 74.59,-0.61 h1.42 r180; Top Overlay "3.3" at 66.421,66.167 h0.89 r90; Top Overlay "SDA1" at 74.59,-3.277 h1.42 r180; Top Overlay "SCL1" at 74.59,-5.69 h1.42 r180; Top Overlay "IOREF" at 113.894,5.715 h1.02 r180; Top Overlay "UUSD" at 113.894,3.175 h1.02 r180; Top Overlay "ERASE" at 82.931,44.577 h1.27 r90; Top Overlay "5V" at 88.646,42.672 h1.27 r90; Top Overlay "MOSI" at 91.186,42.672 h1.27 r90; Top Overlay "GND" at 93.726,42.672 h1.27 r90; Top Overlay "RESET" at 93.726,30.607 h1.27 r90; Top Overlay "SCLK" at 91.186,31.75 h1.27 r90; Top Overlay "MISO" at 88.646,31.75 h1.27 r90
P1: Top Overlay "2" at 203.2,38.735 h1.27 r180; Top Overlay "1" at 202.692,41.275 h1.27 r180; Top Overlay "7" at 191.516,41.275 h1.27 r180; Top Overlay "8" at 191.516,38.735 h1.27 r180
POWER1: Top Overlay "1" at 165.06,33.274 h1.5 r90; Top Overlay "7" at 165.06,40.774 h1.5 r90
"POWER3_Motor Power_1": Top Overlay "1" at 172.86,75.84 h1.5 r90; Top Overlay "7" at 172.86,83.34 h1.5 r90
"POWER3_Motor Power_2": Top Overlay "1" at 172.86,96.287 h1.5 r90; Top Overlay "7" at 172.86,103.787 h1.5 r90